# Altium PCB Smart shoe.PcbDoc
Units mm, origin at the board's own origin, x right, y up, seen from the top; angles counter-clockwise.
Board outline 43.2 x 30.56 mm, 2 copper layers (Top Layer, Bottom Layer); 36 components, 26 nets, 138 pads, 221 vias.
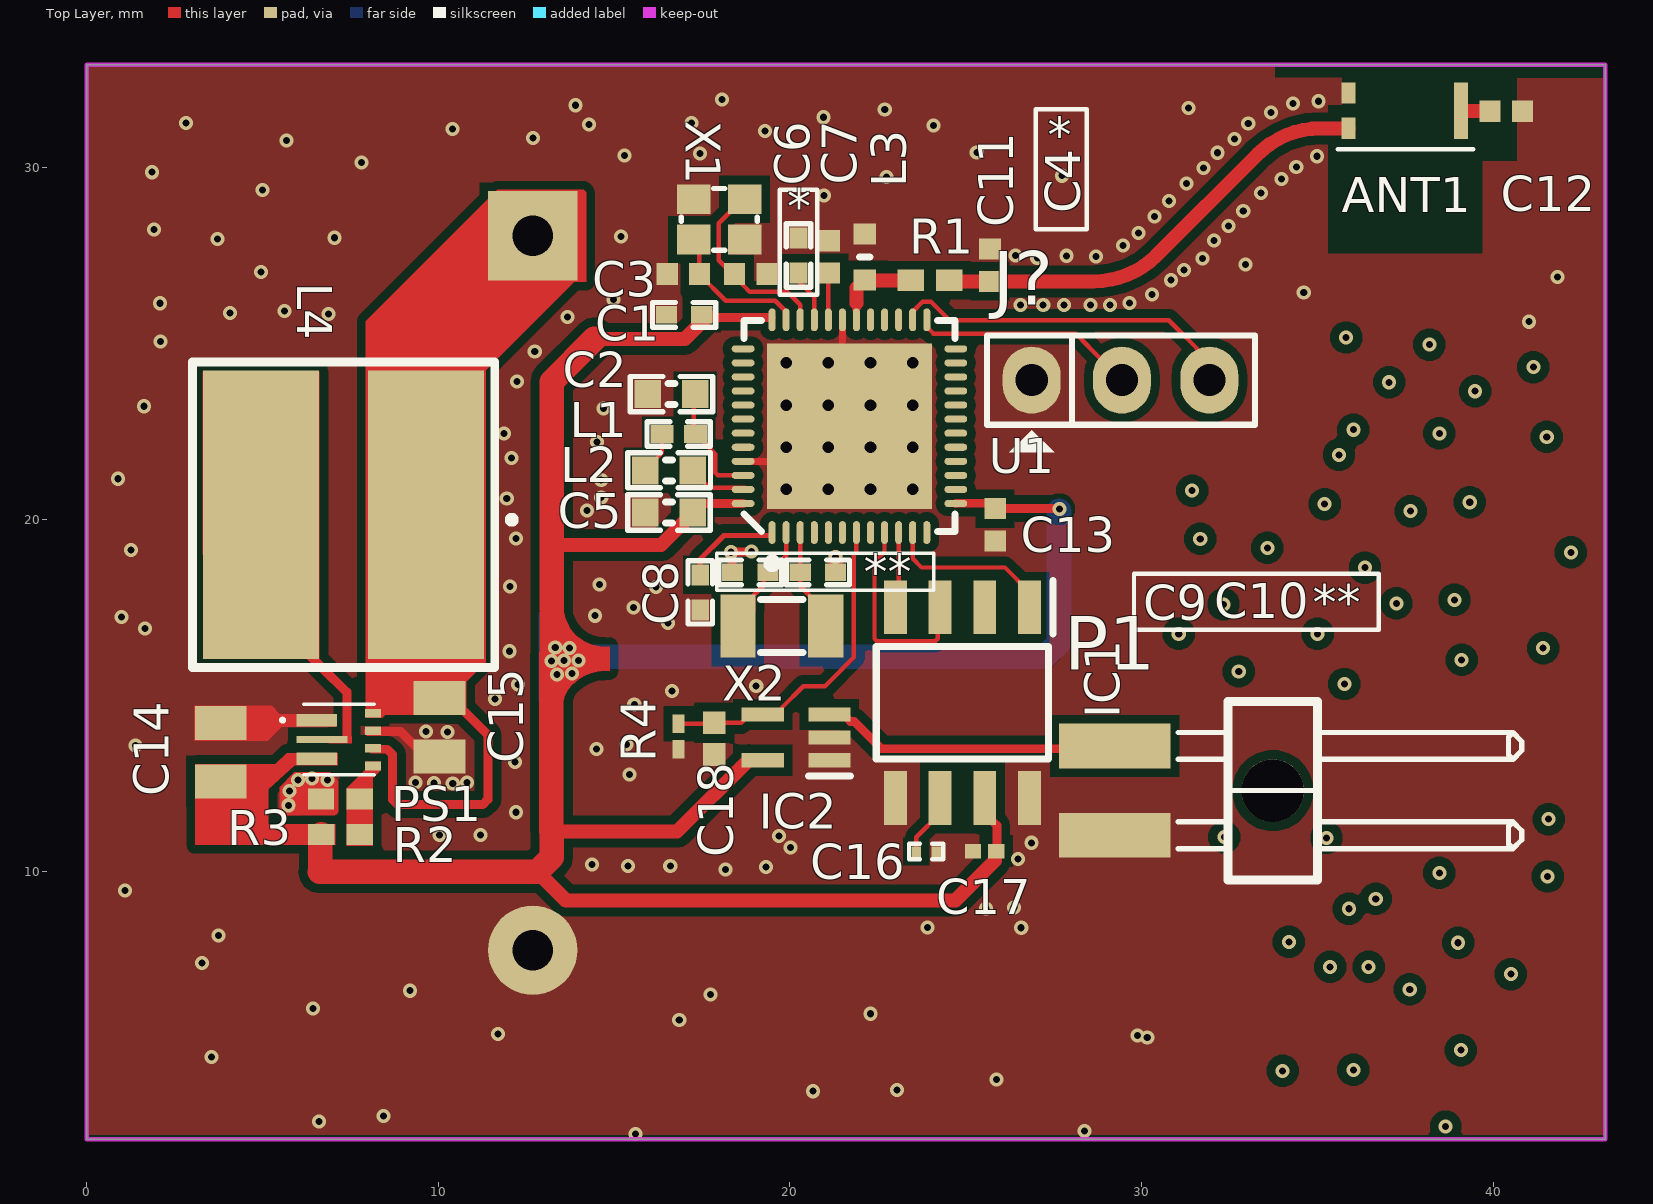
[diagram p0: Top Layer view]
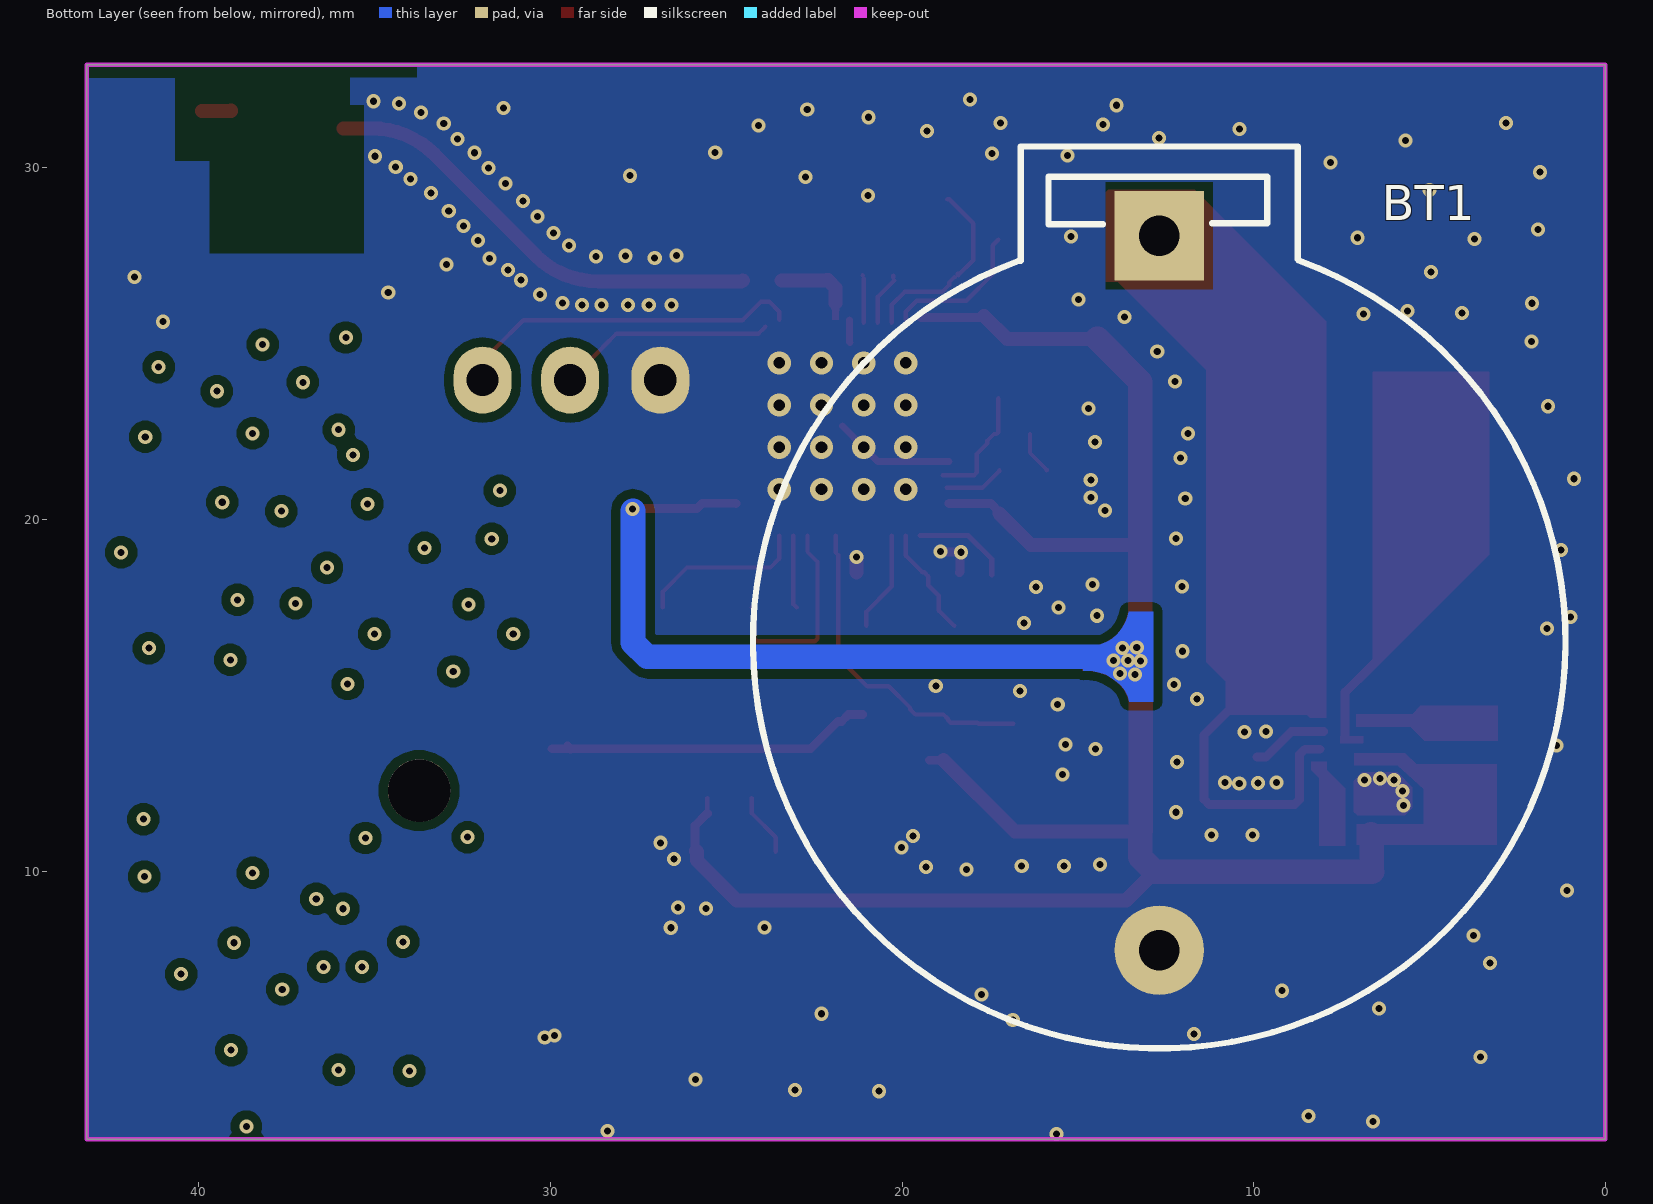
[diagram p1: Bottom Layer view, seen from below]
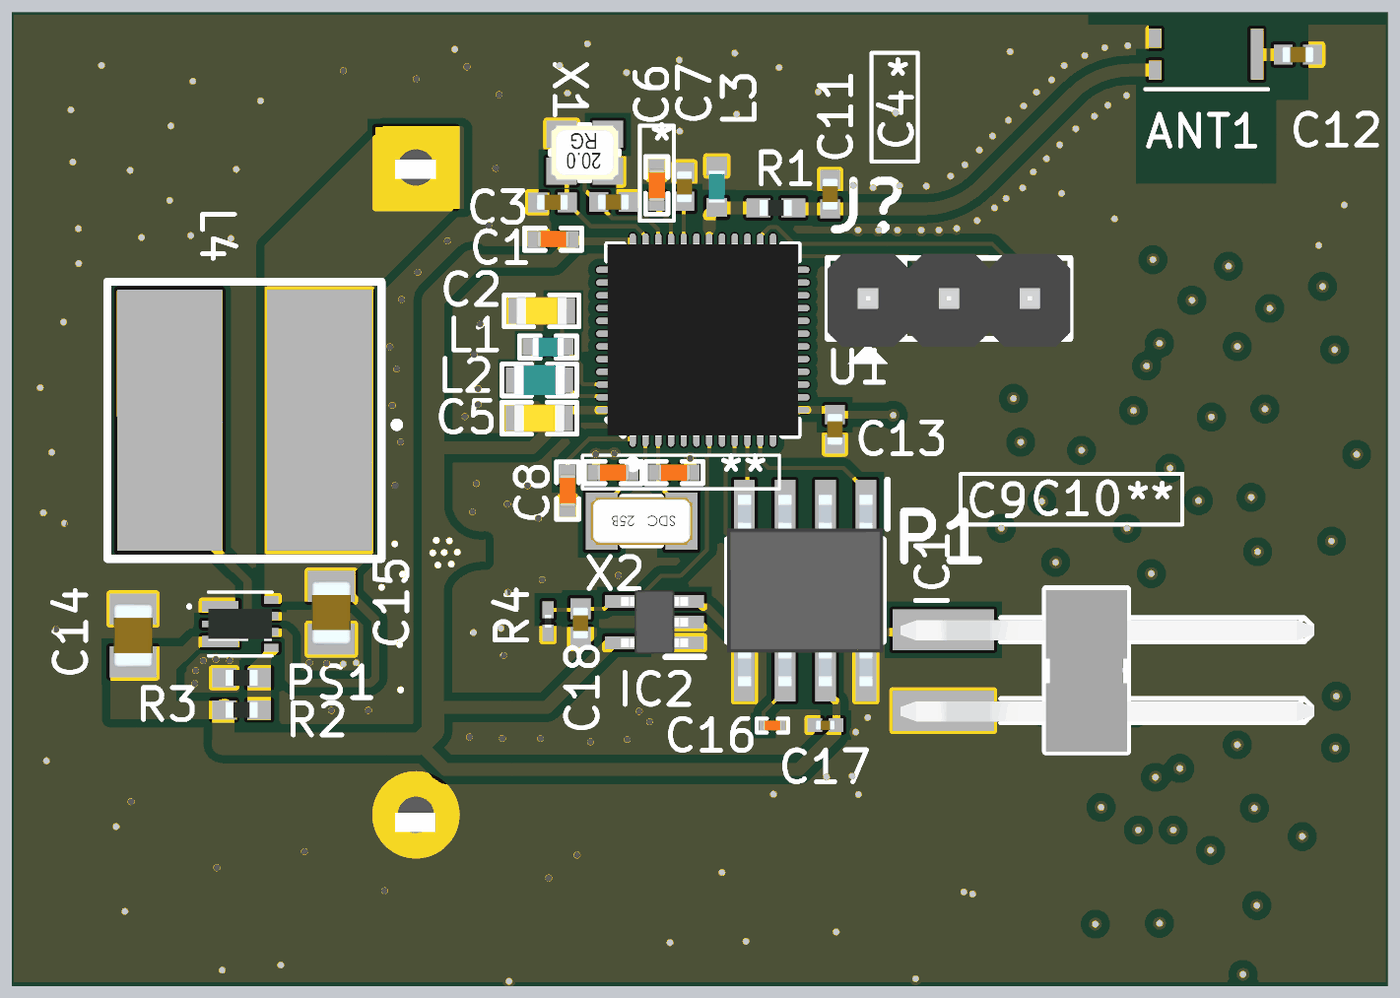
[diagram p2: 3D render of the assembled board from above, using the file's embedded part models]

## Layer stack, top to bottom
Top Solder: solder mask 0.0102, Solder Resist, Dk 3.5
Top Layer: signal copper 0.0356
Dielectric 1: dielectric 0.32, FR-4, Dk 4.8
Bottom Layer: signal copper 0.0356
Bottom Solder: solder mask 0.0102, Solder Resist, Dk 3.5

## Board outline
-0.001,2.374 -0.001,32.935 8.112,32.935 29.709,32.935 43.195,32.935 43.195,2.374

## Design rules (kind name [scope] priority, off if disabled: settings)
Clearance Outline [OnLayer('Keep-Out Layer')    and IsTrack] p1: gap=0 ignorepadtopadclearanceinfootprint=FALSE
Clearance ANT [InNet('ANT1')] p2: gap=0.254 ignorepadtopadclearanceinfootprint=FALSE
Clearance Polygon [InPolygon] p3: gap=0.254 ignorepadtopadclearanceinfootprint=FALSE
Clearance Keepout [IsKeepOut] p4: gap=0.254 ignorepadtopadclearanceinfootprint=FALSE
Clearance [All] p5: gap=0.125 ignorepadtopadclearanceinfootprint=FALSE
HoleToHoleClearance [All] p1: gap=0 allowstackedmicrovias=TRUE
MinimumSolderMaskSliver [All] p1: minsoldermaskwidth=0
PolygonConnect [All] p1: connectstyle=Direct reliefconductorwidth=0.254 reliefentries=4 polygonreliefangle="90 Angle" airgapwidth=0.254
RoomDefinition "Smart shoe_MCU" [InComponentClass('Smart shoe_MCU')] p1 off: confinementstyle=ConfineIn formatcopy=TRUE lockcomponents=FALSE outline -75.115,-66.395 -24.315,-66.395 -24.315,-40.995 -75.115,-40.995
RoomDefinition "Smart shoe_Sensor" [InComponentClass('Smart shoe_Sensor')] p2 off: confinementstyle=ConfineIn formatcopy=TRUE lockcomponents=FALSE outline 103.828,12.345 149.929,12.345 149.929,32.792 103.828,32.792
RoomDefinition "Smart shoe_Power" [InComponentClass('Smart shoe_Power')] p3 off: confinementstyle=ConfineIn formatcopy=TRUE lockcomponents=FALSE outline 103.828,-20.548 161.232,-20.548 161.232,11.075 103.828,11.075
RoutingVias [All] p1: holewidth=0.2 width=0.4 viastyle="Through Hole" minholewidth=0.2 minwidth=0.4 maxholewidth=0.711 maxwidth=1.27
SilkToSilkClearance [All] p1: silktosilkclearance=0
SilkToSolderMaskClearance [IsPad] p1: minsilkscreentomaskgap=0 clearancetoexposedcopper=TRUE
SolderMaskExpansion [All] p1: expansion=0.102 istentingtop=FALSE
Width [All] p1: maxlimit=2 minlimit=0 preferedwidth=0.254
26 further rules are at their usual default settings.

## Classes and differential pairs
component class "Smart shoe_Sensor": C16 C17 C18 IC1 IC2 P1 R4
component class "Smart shoe_Power": BT1 C14 C15 L4 PS1 R2 R3
component class "Smart shoe_MCU": ANT1 C1 C2 C3 C4 C5 C6 C7 C8 C9 C10 C11 C12 C13 J? L1 L2 L3 R1 U1 X1 X2

## Components (designator, comment, footprint, x,y, rotation, side; value= is the part's Value field where it differs from the comment)
ANT1 "WLA.01" TAOGLAS_WLA.01 37.486,31.625 r0 top
BT1 "PIN 3V" PIN3V 12.688,28.068 r270 bottom locked
C1 "100nF" CAPC1005X04L 16.994,25.82 r0 top value=1.2pF
C2 "1uF" CAPC1608X06L 16.635,23.566 r0 top value=4.7µF
C3 "1.2pF" CAPC1005X55N 16.973,26.978 r0 top
C4 "1.2pF" CAPC1005X55N 18.887,26.984 r180 top
C5 "4.7µF" CAPC1608X06L 16.562,20.197 r180 top
C6 "100nF" CAPC1005X04L 20.245,27.509 r270 top value=1.2pF
C7 "NC" CAPC1005X55N 21.116,27.466 r270 top value=1.2pF
C8 "100nF" CAPC1005X04L 17.451,17.925 r270 top value=1.2pF
C9 "1.2pF" CAPC1005X04L 18.873,18.495 r0 top
C10 "1.2pF" CAPC1005X04L 20.794,18.495 r180 top
C11 "1.5pF" CAPC1005X55N 25.691,27.23 r270 top
C12 "3.9pF" CAPC1005X55N 40.373,31.611 r180 top
C13 "100nF" CAPC1005X55N 25.839,19.849 r90 top value=1.2pF
C14 "15uF" CAPC2012X145N 3.812,13.379 r270 top
C15 "10uF" CAPC2012X145N 10.033,14.093 r90 top
C16 "0.1uF" CAPC0603X03L_C 23.878,10.553 r180 top
C17 "1uF" CAPC0603X33N 25.538,10.565 r0 top
C18 "47pF" CAPC1005X56N 17.854,13.768 r90 top
IC1 "AIS1120SXTR" SOIC127P600X175-8N 24.907,14.788 r270 top
IC2 "OPA991TIDCKR" SOT65P210X110-5N 20.177,13.801 r180 top
J? "Jumper 3" JP3 29.419,23.961 r0 top value=J3
L1 "15nH" INDC1005X04L 16.838,22.431 r0 top
L2 "10µH" INDC1608X06L 16.567,21.397 r180 top
L3 "2.2nH" INDC1005X60N 22.132,27.466 r270 top
L4 "VLP8040T-1R0N" VLP8040T_1 7.307,20.133 r180 top
P1 "Pin List 1x2, Angled" LIST_ANG_1x2-SMD-2.54MM 29.24,12.288 r90 top
PS1 "TPS61022RWUR" TPS61022RWUR 7.173,13.74 r0 top
R1 "0R" RESC1005X40N 23.983,26.802 r0 top
R2 "453K" RESC1005X40N 7.217,11.041 r180 top
R3 "100K" RESC1005X40N 7.216,12.054 r0 top
R4 "100k" RESC0402X15N 16.835,13.826 r90 top
U1 "nRF52832-QFAAE0" QFN40P600X600X90-48N 21.695,22.653 r90 top
X1 "32MHz" BT-XTAL_2016 17.988,28.532 r180 top
X2 "32.768kHz" XTAL_3215 19.77,16.971 r180 top

## Footprints (in the part's own frame and the unit in brackets; to place one, negate y for a bottom-side part, rotate by r counter-clockwise, add the part's x,y. Pads: shape width x height; smd on the part's side, far side on the other; paste and mask are expansions set on the pad)
BT-XTAL_2016 [mm]
  rect 0.95x0.85 smd: 1(-0.725,-0.575) 2(0.725,-0.575) 3(0.725,0.575) 4(-0.725,0.575)
  silkscreen extent -1.08,-0.88 1.08,0.88, body extent -1.05,-0.85 1.05,0.85, height 0.56
CAPC0603X03L_C [mm]
  rect 0.27x0.3 smd: 1(-0.285,0) 2(0.285,0)
  silkscreen extent -0.49,-0.22 0.49,0.22, body extent -0.3,-0.15 0.31,0.15, height 0.3
CAPC0603X33N [mm]
  rect 0.46x0.42 smd: 1(-0.33,0) 2(0.33,0)
  body extent -0.3,-0.15 0.3,0.15, height 0.33
CAPC1005X04L [mm]
  rect 0.6x0.5 smd: 1(-0.5,0) 2(0.5,0)
  silkscreen extent -0.9,-0.35 0.9,0.35, body extent -0.51,-0.25 0.51,0.25, height 0.5
CAPC1005X55N [mm]
  rect 0.6x0.62 smd: 1(-0.46,0) 2(0.46,0)
  body extent -0.5,-0.25 0.5,0.25, height 0.55
CAPC1005X56N [mm]
  rect 0.65x0.64 smd: 1(-0.45,0) 2(0.45,0)
  body extent -0.5,-0.25 0.5,0.25, height 0.56
CAPC1608X06L [mm]
  rect 0.75x0.8 smd: 1(-0.675,0) 2(0.675,0)
  silkscreen extent -1.17,-0.5 1.17,0.5, body extent -0.8,-0.43 0.8,0.43, height 0.8
CAPC2012X145N [mm]
  rect 0.97x1.47 smd: 1(-0.83,0) 2(0.83,0)
  body extent -1,-0.63 1,0.63, height 1.45
INDC1005X04L [mm]
  rect 0.65x0.5 smd: 1(-0.475,0) 2(0.475,0)
  silkscreen extent -0.9,-0.35 0.9,0.35, body extent -0.5,-0.3 0.5,0.3, height 0.5
INDC1005X60N [mm]
  rect 0.6x0.65 smd: 1(-0.65,0) 2(0.65,0)
  silkscreen extent 0,-0.15 0,0.15, body extent -0.5,-0.25 0.5,0.25, height 0.6
INDC1608X06L [mm]
  rect 0.75x0.8 smd: 1(-0.675,0) 2(0.675,0)
  silkscreen extent -1.17,-0.5 1.17,0.5, body extent -0.8,-0.48 0.8,0.48, height 0.8
JP3 [mil] "Jumper 3"
  oval 65x75 hole 36: 1(-100,0) 2(1,0) 3(99,0)
  silkscreen extent -150,-81 150,50, body extent -150,-60 150,55, height 355
LIST_ANG_1x2-SMD-2.54MM [mm]
  round 1.78 hole 1.78 unplated: 0(0,-4.496)
  rect 1.27x3.18 smd: 1(-1.27,0) 2(1.27,0)
  silkscreen extent -2.54,-11.58 2.54,-1.8, body extent -2.56,-11.61 2.52,1.35, height 3.03
PIN3V [mil]
  rect 100x100 hole 45: 1(0,0)
  round 100 hole 45: 2(800,0)
  silkscreen extent -100,-455 910,455, body extent -128,-447 1002,449, height 278
QFN40P600X600X90-48N [mm]
  oval 0.65x0.2 smd mask+0.05: 1(-3.025,2.2) 2(-3.025,1.8) 3(-3.025,1.4) 4(-3.025,1) 5(-3.025,0.6) 6(-3.025,0.2) 7(-3.025,-0.2) 8(-3.025,-0.6) 9(-3.025,-1) 10(-3.025,-1.4) 11(-3.025,-1.8) 12(-3.025,-2.2) 25(3.025,-2.2) 26(3.025,-1.8) 27(3.025,-1.4) 28(3.025,-1) 29(3.025,-0.6) 30(3.025,-0.2) 31(3.025,0.2) 32(3.025,0.6) 33(3.025,1) 34(3.025,1.4) 35(3.025,1.8) 36(3.025,2.2)
  oval 0.2x0.65 smd mask+0.05: 13(-2.2,-3.025) 14(-1.8,-3.025) 15(-1.4,-3.025) 16(-1,-3.025) 17(-0.6,-3.025) 18(-0.2,-3.025) 19(0.2,-3.025) 20(0.6,-3.025) 21(1,-3.025) 22(1.4,-3.025) 23(1.8,-3.025) 24(2.2,-3.025) 37(2.2,3.025) 38(1.8,3.025) 39(1.4,3.025) 40(1,3.025) 41(0.6,3.025) 42(0.2,3.025) 43(-0.2,3.025) 44(-0.6,3.025) 45(-1,3.025) 46(-1.4,3.025) 47(-1.8,3.025) 48(-2.2,3.025)
  rect 4.7x4.7 smd: 49(0,0)
  silkscreen extent -4.02,-3 3,3, body extent -3.02,-3.02 3.02,3.02, height 0.86
RESC0402X15N [mm]
  rect 0.525x0.35 smd: 1(-0.362,0) 2(0.362,0)
  body extent -0.2,-0.1 0.2,0.1, height 0.15
RESC1005X40N [mm]
  rect 0.75x0.6 smd: 1(-0.55,0) 2(0.55,0)
  body extent -0.5,-0.25 0.5,0.25, height 0.4
SOIC127P600X175-8N [mm]
  rect 1.525x0.65 smd: 1(-2.712,1.905) 2(-2.712,0.635) 3(-2.712,-0.635) 4(-2.712,-1.905) 5(2.712,-1.905) 6(2.712,-0.635) 7(2.712,0.635) 8(2.712,1.905)
  silkscreen extent -3.47,-2.45 1.6,2.58, body extent -3,-2.45 3,2.45, height 1.75
SOT65P210X110-5N [mm]
  rect 1.2x0.4 smd: 1(-0.95,0.65) 2(-0.95,0) 3(-0.95,-0.65) 4(0.95,-0.65) 5(0.95,0.65)
  silkscreen extent -1.55,1.1 -0.35,1.1, body extent -1.05,-1 1.05,1, height 1
TAOGLAS_WLA.01 [mm] "ANT HIGH EFFICIENCY LOOP SMT"
  rect 0.4x0.6 smd paste-0.01 mask+0.1: 1(-1.6,-0.5) 2(-1.6,0.5)
  rect 0.4x1.6 smd paste-0.01 mask+0.1: 3(1.6,0)
  silkscreen extent -1.9,-1.1 1.95,-1.1, body extent -1.75,-0.95 1.75,0.95, height 0.8
TPS61022RWUR [mm]
  rect 1.15x0.35 smd: 1(-0.625,0.55) 3(-0.625,-0.55)
  rect 1.45x0.2 smd: 2(-0.475,0)
  rect 0.45x0.25 smd: 4(0.975,-0.75) 5(0.975,-0.25) 6(0.975,0.25) 7(0.975,0.75)
  silkscreen extent -1.65,-1 1,1, body extent -1,-0.53 1,0.48, height 1
VLP8040T_1 [mm]
  rect 3.3x8.2 smd: 1(-2.35,0) 2(2.35,0)
  silkscreen extent -4.85,-4.35 4.3,4.35
XTAL_3215 [mm]
  rect 1x1.8 smd: 1(-1.25,0) 2(1.25,0)
  silkscreen extent -0.6,-0.75 0.6,0.75, body extent -1.6,-0.75 1.6,0.75, height 0.81

## Part data
ANT1: library part TAOGLAS_WLA.01, "2.5dBi 240 0MHz to 250MHz WLAN/WIFI/Bluetooth/Zigbee", Temp_High=+85C, Temp_Low=-40C, ComponentLibStatus=Created, Datasheet=http://cdn.taoglas.com/datasheets/WLA.01.pdf, FootprintLibStatus=Created, MFG=Taoglas, MFGPN=WLA.01, RoHS="RoHS Compliant", Version=1.0
BT1: "Battery 3VDC"
C1 C3 C4 C6 C7 C8 C9 C10 C13: "Capacitor, NP0, ±0.1pF", Part Number=C0402-1.2p, Part number IPS=00000005410, Artikkelnr Noca=20029157, Artikkelnr Simpro=N.A., Footprint Doc=0402, LatestRevisionDate=2011-05-11, Note=50V, Pin Count=2, Published=2009-05-08, Publisher="Nordic Semiconductor"
C2 C5: "Capacitor, X5R, ±10%", Part Number=C0603-4µ7, Part number IPS=00000007783, Artikkelnr Noca=20069060, Artikkelnr Simpro=N.A., Footprint Doc=0603, LatestRevisionDate=2009-11-23, Note=6.3V, Pin Count=2, Published=2009-05-08, Publisher="Nordic Semiconductor"
C11: library part GRM1555C1H3R9CA01D, "Capacitor", Manufacturer_Name="Murata Electronics", Mouser Part Number=81-GRM1555C1H3R9CA1D, Arrow Part Number=GRM1555C1H3R9CA01D, Arrow Price/Stock=https://www.arrow.com/en/products/grm1555c1h3r9ca01d/murata-manufacturing, Datasheet Link=https://datasheet.datasheetarchive.com/originals/distributors/Datasheets_SAMA/ec4f1577dddcc7a13ddad897a28002d3.pdf, Height=0.55mm, Manufacturer_Part_Number=GRM1555C1H3R9CA01D, Mouser Price/Stock=https://www.mouser.co.uk/ProductDetail/Murata-Electronics/GRM1555C1H3R9CA01D?qs=4k9rjS6ZRl60G7lbEFmGRg%3D%3D
C12: library part GRM1555C1H1R5CA01D, "Capacitor", Manufacturer_Name="Murata Electronics", Mouser Part Number=81-GRM1555C1H1R5CA1D, Arrow Part Number=GRM1555C1H1R5CA01D, Arrow Price/Stock=https://www.arrow.com/en/products/grm1555c1h1r5ca01d/murata-manufacturing, Datasheet Link=https://datasheet.datasheetarchive.com/originals/distributors/Datasheets_SAMA/ec4f1577dddcc7a13ddad897a28002d3.pdf, Height=0.55mm, Manufacturer_Part_Number=GRM1555C1H1R5CA01D, Mouser Price/Stock=https://www.mouser.co.uk/ProductDetail/Murata-Electronics/GRM1555C1H1R5CA01D?qs=to8XolpOzrMkK3a3HyCgMg%3D%3D
C14: library part C2012X5R1V156M125AC, "Capacitor", Manufacturer_Name=TDK, Mouser Part Number=810-C2012X5R1V156M1C, Arrow Part Number=C2012X5R1V156M125AC, Arrow Price/Stock=https://www.arrow.com/en/products/c2012x5r1v156m125ac/tdk?region=nac, Datasheet Link=https://product.tdk.com/en/search/list#pn=C1608C0G1E103J080AA&site=FBNXDO0R&charset=UTF-8&group=tdk_pdc_en&design=producttdkcom-en&fromsyncsearch=1&_l=20&_p=1&_c=part_no-part_no&_d=667, Height=0.75mm, Manufacturer_Part_Number=C2012X5R1V156M125AC, Mouser Price/Stock=https://www.mouser.co.uk/ProductDetail/TDK/C2012X5R1V156M125AC?qs=xLDY6iXSiQZGpZ5eDP6b8w%3D%3D
C15: library part C0805C106K8PACTU, "Capacitor", Manufacturer_Name=Kemet, Mouser Part Number=80-C0805C106K8P, Arrow Part Number=C0805C106K8PACTU, Arrow Price/Stock=https://www.arrow.com/en/products/c0805c106k8pactu/kemet-corporation, Datasheet Link=https://www.arrow.com/en/products/c0805c106k8pactu/kemet-corporation, Height=1.4mm, Manufacturer_Part_Number=C0805C106K8PACTU, Mouser Price/Stock=https://www.mouser.co.uk/ProductDetail/KEMET/C0805C106K8PACTU?qs=Zpyg6gQUYs39C21BeavaKA%3D%3D
C16: library part C0603X7S1A104K030BC, "Capacitor", Manufacturer_Name=TDK, Mouser Part Number=810-C0603X7S1A104K, Datasheet Link=https://product.tdk.com/system/files/dam/doc/product/capacitor/ceramic/mlcc/catalog/mlcc_commercial_general_en.pdf, Height=0.33mm, Manufacturer_Part_Number=C0603X7S1A104K030BC, Mouser Price/Stock=https://www.mouser.com/Search/Refine.aspx?Keyword=810-C0603X7S1A104K
C17: library part GRM033R61A105ME15E, "Capacitor", Manufacturer_Name="Murata Electronics", Mouser Part Number=81-GRM033R61A105ME5E, Datasheet Link=https://datasheet.datasheetarchive.com/originals/distributors/DKDS-10/190794.pdf, Height=0.33mm, Manufacturer_Part_Number=GRM033R61A105ME15E, Mouser Price/Stock=https://www.mouser.co.uk/ProductDetail/Murata-Electronics/GRM033R61A105ME15E?qs=BZBei1rCqCCF%2FCkYfqSFSg%3D%3D
C18: library part 0402ZA470JAT2A, "Capacitor", Manufacturer_Name=AVX, Height=0.56mm, Manufacturer_Part_Number=0402ZA470JAT2A
IC1: "Integrated Circuit", Manufacturer_Name=STMicroelectronics, Mouser Part Number=511-AIS1120SXTR, Arrow Part Number=AIS1120SXTR, Arrow Price/Stock=https://www.arrow.com/en/products/ais1120sxtr/stmicroelectronics?region=nac, Datasheet Link=https://www.st.com/resource/en/datasheet/ais1120sx.pdf, Height=1.75mm, Manufacturer_Part_Number=AIS1120SXTR, Mouser Price/Stock=https://www.mouser.co.uk/ProductDetail/STMicroelectronics/AIS1120SXTR?qs=BA62vJVifGoAj%2Fv2Aa%252BKHA%3D%3D
IC2: "Integrated Circuit", Manufacturer_Name="Texas Instruments", Mouser Part Number=595-OPA991TIDCKR, Datasheet Link=https://www.ti.com/lit/ds/symlink/opa991.pdf?ts=1634650356786&ref_url=https%253A%252F%252Feu.mouser.com%252F, Height=1.1mm, Manufacturer_Part_Number=OPA991TIDCKR, Mouser Price/Stock=https://www.mouser.co.uk/ProductDetail/Texas-Instruments/OPA991TIDCKR?qs=Wj%2FVkw3K%252BMD%2FIzu2Yv2xzw%3D%3D
J?: library part JP3
L1: "Inductor, 320mA, ±5%", 2nd source part number=658-1328, Manufacturer="Taiyo Yuden", Manufacturer Part Number=HK100515NJ-T, Part Number=L0402-15n, Part number IPS=00000003215, Supplier part number=587-1521-1-ND, 2nd source Supplier=Farnell, Artikkelnr Noca=33029323, Artikkelnr Simpro=N.A., ComponentLink1Description=Datasheet, ComponentLink2Description="Supplier link", Datasheet=http://www.yuden.co.jp/productdata/catalog/en/mlci04_e.pdf, Footprint Doc=0402, LatestRevisionDate=2012-09-19, Note="High frequency chip inductor ±10%", Pin Count=2, Published=2010-07-12, Publisher="Nordic Semiconductor", Supplier=Digi-Key
L2: "Inductor, 80mA, ±10%", 2nd source part number=178-6105, Manufacturer="Taiyo Yuden", Manufacturer Part Number=LBMF1608T100K, Part Number=L0603-10µ, Part number IPS=00000007794, Supplier part number=587-1714-1-ND, 2nd source Supplier=Farnell, Artikkelnr Noca=33029314, Artikkelnr Simpro=N.A., ComponentLink1Description=Datasheet, ComponentLink2Description="Supplier link", Datasheet=http://www.yuden.co.jp/ut/product/pdf/elb2_e.pdf, Footprint Doc=0603, LatestRevisionDate=2012-09-19, Note="LBMF1608T100K 10µH 80mA 0603", Pin Count=2, Published=2010-02-24, Publisher="Nordic Semiconductor", Supplier=Digi-Key
L3: library part MLK1005S2N2ST000, "Inductor", Manufacturer_Name=TDK, Mouser Part Number=810-MLK1005S2N2ST000, Arrow Part Number=MLK1005S2N2ST000, Arrow Price/Stock=https://www.arrow.com/en/products/mlk1005s2n2st000/tdk, Datasheet Link=https://product.tdk.com/system/files/dam/doc/product/inductor/inductor/smd/catalog/inductor_commercial_high-frequency_mlk1005_en.pdf, Height=0.6mm, Manufacturer_Part_Number=MLK1005S2N2ST000, Mouser Price/Stock=https://www.mouser.com/Search/Refine.aspx?Keyword=810-MLK1005S2N2ST000
L4: "Inductor", Manufacturer_Name=TDK, Mouser Part Number=810-VLP8040T-1R0N, Arrow Part Number=VLP8040T-1R0N, Arrow Price/Stock=https://www.arrow.com/en/products/vlp8040t-1r0n/tdk, Datasheet Link=http://www.mouser.com/ds/2/400/nductor_commercial_power_vlp8040_en-952627.pdf, Manufacturer_Part_Number=VLP8040T-1R0N, Mouser Price/Stock=https://www.mouser.co.uk/ProductDetail/TDK/VLP8040T-1R0N?qs=uxmvvYJjMIuWRhSk5I768Q%3D%3D
P1: "Pin List 1x2, 2.54mm (100mil), Right Angled, SMD", 2nd source part number=TSM-102-01-L-SH-A, Manufacturer=W-CON, Manufacturer Part Number=1125B-1102S0Z135R2, Part Number="Pin List Ang 1x2 SMD, 2.54mm", 2nd source Supplier=Samtec, Artikkelnr Noca=55010023, Artikkelnr Simpro=N.A., Datasheet=\\hizz\pro\app9717\Datasheet\connectores\W-CON\1125B-11XXXXZXXXXX.pdf, Footprint Doc=LIST_ANG_1x2-SMD-2.54MM, LatestRevisionDate=2016-05-26, Pin Count=2, Published=2016-01-22, Publisher="Nordic Semiconductor", Supplier=Cabcon, Supplier part number=1125B-1102S0Z135R2
PS1: "Power Supply", Manufacturer_Name="Texas Instruments", Mouser Part Number=595-TPS61022RWUR, Arrow Part Number=TPS61022RWUR, Arrow Price/Stock=https://www.arrow.com/en/products/tps61022rwur/texas-instruments?region=nac, Datasheet Link=http://www.ti.com/lit/gpn/TPS61022, Height=1mm, Manufacturer_Part_Number=TPS61022RWUR, Mouser Price/Stock=https://www.mouser.co.uk/ProductDetail/Texas-Instruments/TPS61022RWUR?qs=vLWxofP3U2zlxrk4cD0iFA%3D%3D
R1: library part RC0402FR070RL, "Resistor", Manufacturer_Name="YAGEO (PHYCOMP)", Height=0.4mm, Manufacturer_Part_Number=RC0402FR070RL
R2: library part CRCW0402453KFKED, "Resistor", Manufacturer_Name=Vishay, Mouser Part Number=71-CRCW0402-453K-E3, Arrow Part Number=CRCW0402453KFKED, Arrow Price/Stock=https://www.arrow.com/en/products/crcw0402453kfked/vishay, Datasheet Link=http://www.vishay.com/docs/20035/dcrcwe3.pdf, Height=0.4mm, Manufacturer_Part_Number=CRCW0402453KFKED, Mouser Price/Stock=https://www.mouser.co.uk/ProductDetail/Vishay-Dale/CRCW0402453KFKED?qs=rzhQWu8UUS1a9YBNTq1G%2FA%3D%3D
R3: library part CRCW0402100KFKEDHP, "Resistor", Manufacturer_Name=Vishay, Mouser Part Number=71-CRCW0402100KFKEDH, Arrow Part Number=CRCW0402100KFKEDHP, Arrow Price/Stock=https://www.arrow.com/en/products/crcw0402100kfkedhp/vishay?region=nac, Datasheet Link=http://www.vishay.com/docs/20035/dcrcwe3.pdf, Height=0.4mm, Manufacturer_Part_Number=CRCW0402100KFKEDHP, Mouser Price/Stock=https://www.mouser.co.uk/ProductDetail/Vishay-Dale/CRCW0402100KFKEDHP?qs=k2%2FDWSARqgGFakjlJe4Ejw%3D%3D
R4: library part CRCW0100100KFREL, "Resistor", Manufacturer_Name=Vishay, Mouser Part Number=71-CRCW0100100KFREL, Arrow Part Number=CRCW0100100KFREL, Arrow Price/Stock=https://www.arrow.com/en/products/crcw0100100kfrel/vishay?region=nac, Datasheet Link=https://www.mouser.com/datasheet/2/427/crcw01005e3-1149660.pdf, Height=0.15mm, Manufacturer_Part_Number=CRCW0100100KFREL, Mouser Price/Stock=https://www.mouser.co.uk/ProductDetail/Vishay-Dale/CRCW0100100KFREL?qs=3CaSHoNeR5u3JhUOs4PYBg%3D%3D
U1: "Multi-protocol Bluetooth Low Energy, ANT and 2.4GHz proprietary system-on-chip", Manufacturer="Nordic Semiconductor", Part number IPS=N.A., Artikkelnr Noca=N.A., ComponentLink1Description=Datasheet, ComponentLink2Description="Supplier link", Footprint Doc=QFN-48, LatestRevisionDate=2017-10-18, Manufacturer Part Number=nRF52832-QFAAE0, Part Number=nRF52832-QFAAE0, Pin Count=48, Published=2017-10-18, Publisher="Nordic Semiconductor", Supplier 1="Nordic Semiconductor", Supplier Part Number 1=nRF52832-QFAAE0
X1: "XTAL SMD 2016, 32MHz, Cl=8pF, Tol: ±10ppm, Stab: ±10ppm", Manufacturer="Epson Toyocom", Manufacturer Part Number=Q22FA12800025, Part Number=XTAL_SMD2016_32MHz_8pF_Epson, Supplier part number=171-2806, Artikkelnr Noca=22019238, Artikkelnr Simpro=N.A., Datasheet=http://www.epsondevice.com/docs/qd/en/DownloadServlet?id=ID000449, Footprint Doc=XTAL_2016, LatestRevisionDate=2014-11-27, Note="XTAL SMD 32.000MHz", Pin Count=4, Published=2012-03-09, Publisher="Nordic Semiconductor", Supplier=Farnell
X2: "XTAL SMD 3215, 32.768kHz, 9pF, ±20ppm", 2nd source part number=127-8037, Manufacturer="Epson Toyocom", Manufacturer Part Number="FC-135 32.768KHZ ±20PPM,9.0PF", Part Number="XTAL_FC-135 32.768k", Supplier part number="FC-135 32.7680KA-AC-ND", 2nd source Supplier=Farnell, Artikkelnr Noca=22019091, Artikkelnr Simpro=N.A., Datasheet=http://www.farnell.com/datasheets/57480.pdf, Footprint Doc=XTAL_3215, LatestRevisionDate=2014-03-27, Note="XTAL SMD 32.768kHz, 3215", Pin Count=2, Published=2010-10-18, Publisher="Nordic Semiconductor", Supplier=Digi-Key

## Via types
v1: diameter 0.4, hole 0.2, Top Layer to Bottom Layer, tented both sides, 205 vias
v2: diameter 0.66, hole 0.33, Top Layer to Bottom Layer, tented both sides, 16 vias

## Nets (pads, with @x,y where several pads share a name; then routed paths per layer and width w, separated by ;. In a path a pad name is that pad's centre, name@x,y a point inside that pad or via, vN(x,y) a via of type N, cw(c..) or ccw(c..) an arc to the next point about the centre after c; other vN are vias at no path point)
ADC: C18.2 IC2.4 R4.2 U1.7 | length 9.3
  Top Layer w0.125: R4.2 17.823,14.188 C18.2 18.616,14.218 18.689,14.292 18.689,14.314 18.827,14.451 19.627,14.451 19.764,14.589 19.764,14.635 20.383,15.254 20.997,15.254 21.823,16.08 21.823,18.99 21.893,19.06 U1.7@21.893,19.544
ANT: L3.2 R1.1 U1.30 | length 2.1
  Top Layer w0.4: 21.897,26.152 21.897,26.581 22.007,26.691 22.007,26.716 22.107,26.816 L3.2 ccw(c22.165,26.849) 22.165,26.802 R1.1
ANT1: ANT1.1 C11.2 R1.2 | length 12.9
  Top Layer w0.4: R1.2 ccw(c24.611,26.879) 24.611,26.77 C11.2 28.636,26.77 ccw(c28.636,29.31) 30.432,27.514 33.3,30.381 cw(c35.096,28.585) 35.096,31.125 ANT1.1
CLK: IC1.1 U1.11 | length 4.8
  Top Layer w0.125: U1.11@23.493,19.544 23.493,18.887 23.748,18.632 26.118,18.632 26.812,17.938 IC1.1
CS: IC1.4 U1.10 | length 2.1
  Top Layer w0.125: IC1.4 23.093,17.591 U1.10@23.093,19.544
GND: ANT1.2 BT1.2 C1.1 C2.1 C3.1 C4.1 C5.2 C6.1 C7.1 C8.2 C9.1 C10.1 C11.1 C12.1 C13.1 C14.1 C15.1 C16.1 C17.1 C18.1 IC1.5 IC1.8 IC2.1 IC2.2 J?.1 L3.1 P1.1 PS1.1 PS1.6 R3.1 R4.1 U1.31 U1.45 U1.49 X1.2 X1.4 | length 7.9
  Top Layer w0.2: U1.45 19.308,21.653 19.32,21.642 20.683,21.642 v2(21.095,22.053) U1.49 ; 21.485,25.037 21.495,25.047 U1.31
  Top Layer w0.254: PS1.6@8.02,13.966 8.928,13.966 9.655,13.239 C15.1@9.905,13.239 ; C9.1 18.353,18.515 18.353,19.046 v1(18.332,19.067) 18.342,19.077 18.905,19.077 v1(18.915,19.088)
  Top Layer w0.4: C10.1 21.295,18.496 v1(21.295,18.933)
  other v1: 15.612,2.524 28.376,2.602 6.607,2.876 8.447,3.033 20.663,3.737 23.051,3.777 25.879,4.074 3.553,4.716 30.165,5.263 29.888,5.325 11.704,5.365 16.854,5.768 22.293,5.941 6.438,6.085 17.747,6.487 9.191,6.596 3.279,7.379 3.749,8.162 26.581,8.387 23.912,8.397 25.574,8.933 26.379,8.962 1.092,9.445 18.169,10.042 19.321,10.117 15.402,10.147 16.599,10.147 14.37,10.191 26.494,10.343 20.024,10.67 26.868,10.804 19.695,10.999 10.033,11.029 11.197,11.029 12.208,11.672 5.746,11.87 5.774,12.279 10.412,12.484 9.883,12.5 9.347,12.524 10.812,12.524 6.013,12.586 6.844,12.593 6.41,12.631 15.438,12.75 12.177,13.096 14.498,13.468 1.391,13.571 15.353,13.605 10.26,13.958 9.651,13.966 15.575,14.733 11.611,14.888 16.651,15.126 19.044,15.262 12.269,15.302 12.024,16.251 1.658,16.898 16.532,17.057 0.992,17.231 14.464,17.262 15.558,17.501 12.039,18.089 16.19,18.082 14.584,18.15 1.258,19.128 12.208,19.452 14.225,20.252 11.948,20.601 14.635,20.628 14.635,21.123 0.892,21.157 12.086,21.749 14.515,22.2 11.871,22.438 14.703,23.157 1.626,23.219 12.239,23.924 12.744,24.782 2.1,25.057 41.026,25.623 41.026,25.623 13.678,25.762 6.879,25.838 4.076,25.869 5.623,25.93 26.565,26.105 27.206,26.105 27.803,26.105 28.55,26.105 29.102,26.105 2.09,26.149 29.663,26.154 14.98,26.252 30.304,26.403 34.616,26.455 30.847,26.804 41.832,26.89 4.964,27.033 31.216,27.098 32.959,27.257 27.037,27.433 31.735,27.427 28.709,27.483 26.416,27.508 27.873,27.499 29.471,27.797 32.064,27.929 3.721,27.979 7.048,28.012 15.194,28.044 29.918,28.153 1.917,28.243 32.48,28.345 30.373,28.617 32.896,28.778 30.787,29.055 20.968,29.208 33.398,29.281 4.995,29.376 31.283,29.552 33.987,29.679 22.754,29.743 27.746,29.776 1.857,29.876 31.763,29.999 34.404,30.024 7.813,30.157 34.992,30.33 15.302,30.356 17.446,30.402 25.316,30.441 32.169,30.429 5.684,30.774 32.641,30.818 12.698,30.846 19.299,31.045 10.409,31.107 14.291,31.229 24.085,31.207 2.82,31.275 17.197,31.273 33.038,31.265 20.957,31.44 33.684,31.58 22.699,31.658 31.339,31.706 13.908,31.78 34.313,31.828 35.033,31.894 18.074,31.949
  other v2: 19.895,20.853 21.095,20.853 22.295,20.853 23.495,20.853 19.895,22.053 22.295,22.053 23.495,22.053 19.895,23.253 21.095,23.253 22.295,23.253 23.495,23.253 19.895,24.453 21.095,24.453 22.295,24.453 23.495,24.453
NetANT1_3: ANT1.3 C12.2 | length 0.8
  Top Layer w0.4: ANT1.3 39.086,31.611 C12.2
NetC2_2: C2.2 L1.2 U1.46 | length 3.4
  Top Layer w0.125: C2.2@17.272,23.443 17.272,22.472 L1.2 17.388,22.431 17.575,22.244 17.575,22.169 17.881,21.862 17.881,21.332 17.955,21.259 U1.46@18.852,21.259
NetC3_2: C3.2 U1.35 X1.3 | length 4.2
  Top Layer w0.125: X1.3 17.423,27.798 17.423,26.987 C3.2 17.433,26.968 18.179,26.221 19.583,26.221 19.895,25.91 U1.35
NetC4_2: C4.2 U1.34 X1.1 | length 5.3
  Top Layer w0.125: C4.2@18.403,26.95 17.981,27.371 17.981,28.425 18.663,29.107 X1.1 ; C4.2@18.427,26.974 C4.2 ; C4.2@18.508,26.892 18.664,26.736 18.664,26.667 18.86,26.472 19.93,26.472 20.293,26.108 U1.34@20.293,25.594
NetC6_2: C6.2 U1.33 | length 1.4
  Top Layer w0.125: C6.2@20.227,26.795 20.692,26.33 U1.33@20.692,25.595 ; C6.2@20.258,26.876 C6.2@20.258,26.926
NetC7_2: C7.2 U1.32 | length 1.3
  Top Layer w0.125: U1.32@21.093,25.594 C7.2@21.093,26.859 ; C7.2@21.119,26.945 C7.2@21.123,26.94
NetC8_1: C8.1 U1.1 | length 2.8
  Top Layer w0.15: C8.1 17.451,18.873 18.123,19.544 U1.1@19.493,19.544
NetC9_2: C9.2 U1.2 X2.2 | length 3.2
  Top Layer w0.125: X2.2 18.958,17.408 18.958,17.829 19.259,18.13 19.259,18.381 C9.2 19.423,18.495 19.893,18.964 U1.2@19.893,19.544
NetC10_2: C10.2 U1.3 X2.1 | length 2.9
  Top Layer w0.125: C10.2@20.293,18.496 U1.3@20.293,19.544 ; C10.2@20.294,18.495 20.294,18.097 21.02,17.371 X2.1
NetC16_2: C16.2 IC1.6 | length 1.8
  Top Layer w0.125: C16.2 23.593,10.96 24.272,11.639 IC1.6
NetIC2_3: IC2.3 P1.2 | length 9.4
  Top Layer w0.254: IC2.3 21.527,14.451 21.725,14.253 21.831,14.253 22.607,13.478 P1.2@29.956,13.478 ; P1.2@29.433,13.468 P1.2@29.517,13.553
NetL1_1: L1.1 L2.2 | length 1.2
  Top Layer w0.125: L2.2 15.892,21.422 16.363,21.892 L1.1
NetL2_1: L2.1 U1.47 | length 1.7
  Top Layer w0.125: L2.1 17.242,21.372 17.714,20.899 U1.47@18.732,20.899
NetL4_2: L4.2 PS1.2 | length 7.3
  Top Layer w0.254: L4.2@4.829,20.109 4.829,17.659 7.402,15.086 PS1.2@7.402,13.84
NetPS1_4: PS1.4 R2.1 R3.2
SDO: IC1.3 U1.9 | length 5.8
  Top Layer w0.125: U1.9@22.693,19.544 22.693,19.077 22.409,18.793 22.409,16.61 22.482,16.537 24.131,16.537 24.204,16.61 24.204,17.432 IC1.3
SWDCLK: J?.2 U1.25 | length 6.2
  Top Layer w0.125: U1.25@23.893,25.475 24.083,25.286 28.127,25.286 28.502,24.911 28.502,24.904 J?.2
SWDIO: J?.3 U1.26 | length 10
  Top Layer w0.125: U1.26 23.495,25.91 23.776,26.191 24.014,26.191 24.538,25.667 30.775,25.667 31.552,24.89 31.552,24.883 31.934,24.501 J?.3
VDD_nRF: C1.2 C5.1 C13.2 C14.2 C17.2 IC1.7 IC2.5 PS1.3 R2.2 U1.13 U1.36 U1.48 | length 79.3
  Top Layer w0.125: IC1.7@25.542,11.639 IC1.7
  Top Layer w0.254: C5.1@17.237,20.172 17.237,20.207 17.485,20.455 18.669,20.455 U1.48 ; C1.2@17.667,25.792 17.667,25.749 U1.36@19.468,25.749 ; IC2.5@18.827,13.151 IC2.5 ; U1.13 24.728,20.461 25.687,20.461 C13.2 27.56,20.309 27.617,20.252 v1@27.656,20.252 ; IC1.7@25.542,11.639 25.887,11.295 25.887,10.648 25.868,10.63 C17.2
  Top Layer w0.4: 12.816,9.978 13.626,9.168 24.711,9.168 25.838,10.295 25.838,10.555 25.848,10.565 C17.2 ; 13.226,11.12 16.796,11.12 IC2.5@18.827,13.151 ; 13.226,19.27 16.335,19.27 C5.1@17.237,20.172 ; 14.444,25.136 17.01,25.136 C1.2@17.667,25.792
  Top Layer w0.7: R2.2 6.642,11.016 6.642,9.996 6.624,9.978 12.816,9.978 13.226,10.388 13.226,11.12 13.217,11.129 v1(13.217,15.97) ; v1@13.226,16.005 v1@13.445,16.224 ; 13.226,16.169 13.217,16.161 v1(13.217,15.97) ; 13.226,16.186 13.328,16.288 v1(13.328,16.362) 13.328,16.63 ; v1(13.379,15.589) 13.379,16.159 ; 14.444,25.136 13.226,23.918 13.226,19.27 13.226,16.119 13.217,16.111 v1(13.217,15.97)
  Bottom Layer w0.7: v1(13.988,15.993) 14.085,16.09 27.246,16.09 27.656,16.5 v1@27.656,20.252
  other v1: 13.799,15.621 13.576,15.983 13.737,16.349 27.668,20.292
VIN: BT1.1 C15.2 L4.1 PS1.5 PS1.7 | length 8.5
  Top Layer w0.254: PS1.5@8.118,13.464 8.549,13.464 8.697,13.315 8.697,12.037 8.846,11.888 11.265,11.888 11.413,12.037 11.413,13.871 10.72,14.565 10.239,14.565 C15.2@9.905,14.899
pads on no net: IC1.2 P1.0 U1.4 U1.5 U1.6 U1.8 U1.12 U1.14 U1.15 U1.16 U1.17 U1.18 U1.19 U1.20 U1.21 U1.22 U1.23 U1.24 U1.27 U1.28 U1.29 U1.37 U1.38 U1.39 U1.40 U1.41 U1.42 U1.43 U1.44
copper on no net:
  other v1: 38.65,2.739 34.015,4.318 36.027,4.344 39.083,4.904 37.632,6.636 40.509,7.068 35.365,7.272 36.46,7.272 39.007,7.96 34.194,7.985 35.9,8.928 36.664,9.208 41.553,9.844 38.472,9.946 35.263,10.939 32.36,10.965 41.579,11.474 35.773,15.319 32.768,15.676 39.109,16.007 41.426,16.338 31.061,16.746 35.009,16.746 32.335,17.586 37.25,17.611 38.905,17.713 36.358,18.63 42.215,19.063 33.583,19.19 31.673,19.445 37.657,20.234 35.212,20.438 39.338,20.489 31.443,20.82 35.62,21.839 41.528,22.348 38.472,22.45 36.027,22.552 39.491,23.647 37.046,23.901 41.146,24.334 38.192,24.971 35.823,25.175

## Polygon pours and split planes (outlines as drawn)
GND on Bottom Layer "GND_L02_P009" (solid, pour order 9): 33.569,32.86 33.791,32.86 33.791,32.556 35.697,32.556 35.697,31.8 35.296,31.8 35.296,27.558 39.701,27.558 39.701,30.191 40.694,30.191 40.694,32.549 43.201,32.549 43.201,2.374 0.022,2.374 0.022,32.858 33.79,32.858
GND on Bottom Layer "GND_L02_P008" (solid, pour order 8): 24.051,24.904 24.01,20.305 22.31,18.604 20.916,18.604 19.334,20.187 19.334,24.904 19.421,24.904
GND on Bottom Layer "GND_L02_P006" (solid, pour order 6): 3.08,14.679 14.763,14.679 14.763,5.833 11.369,5.833 8.71,8.492 8.71,11.351 5.654,11.351 5.422,11.583 5.422,13.551 3.222,13.551 3.072,13.701
GND on Top Layer "GND_L01_P003" (solid, remove dead copper, pour order 3): 33.569,32.86 33.791,32.86 33.791,32.556 35.697,32.556 35.697,31.8 35.296,31.8 35.296,27.558 39.701,27.558 39.701,30.191 40.694,30.191 40.694,32.549 43.201,32.549 43.201,2.497 0.022,2.497 0.022,32.858 33.79,32.858

## Keep-outs
Keep-Out Layer:
  lines w0.125: -0.001,2.374 9.74,2.374 31.338,2.374 43.195,2.374 43.195,32.935 29.709,32.935 8.112,32.935 -0.001,32.935 -0.001,2.374

## Other copper
Top Layer:
  region net VDD_nRF: 13.573,17.378 ccw(c14.729,17.554) 14.873,16.393 14.873,15.689 ccw(c14.775,14.332) 13.9,15.374 ccw(c14.415,14.673) 13.557,14.817
  region net ANT: 21.799,25.678 21.799,25.884 ccw(c21.512,25.884) 21.715,26.087 cw(c21.752,26.124) 21.7,26.124 21.7,26.152 22.095,26.152 22.095,26.153 22.095,26.146 cw(c21.981,26.146) 22.062,26.065 ccw(c22.232,25.894) 21.991,25.894 21.991,25.679
  region net GND: 6.926,12.809 5.911,12.809 5.488,12.386 5.488,11.787 5.694,11.581 7.059,11.581 7.152,11.675 7.152,12.567
  region net VDD_nRF: 3.091,10.751 7.056,10.751 7.066,10.731 7.066,11.329 5.171,11.329 5.171,12.32 5.912,13.003 7.14,13.003 7.14,13.355 5.695,13.355 5.385,13.045 3.091,13.033
  region net VIN: 7.937,14.367 8.413,14.367 8.491,14.445 10.789,14.445 10.789,15.385 11.349,15.945 11.349,24.242 13.874,26.767 14.204,26.767 14.204,29.3 14.134,29.37 11.671,29.37 7.937,25.636
  region net GND: 7.086,14.102 5.55,14.099 5.154,13.703 3.062,13.703 3.062,14.697 5.262,14.694 5.497,14.459 7.09,14.459
  region net NetL4_2: 3.3,24.208 6.621,24.208 6.621,16.035 7.295,15.361 6.938,15.361 3.307,18.992
  region net NetL4_2: 6.879,13.641 7.533,13.641 7.533,13.84 6.879,13.84
  region net NetPS1_4: 8.14,10.716 7.393,10.716 7.393,12.349 7.926,12.882 7.926,13.111 8.37,13.111 8.37,12.87 8.14,12.64
Bottom Layer:
  region net VDD_nRF: 13.538,14.82 cw(c14.395,14.676) 13.881,15.376 cw(c14.756,14.335) 14.756,15.695 cw(c14.756,14.335) 14.853,15.692 14.853,16.396 cw(c14.71,17.557) 14.71,16.387 cw(c14.71,17.557) 13.554,17.381 13.538,14.852 13.554,17.381 12.857,17.381 12.857,14.82 13.538,14.82

## Silkscreen, mask and mechanical layers (free items; w line width, h text height)
Top Overlay:
  lines w0.1: 17.92,17.98 24.098,17.98 24.098,19.035 17.92,19.035 17.92,17.98
  lines w0.125: 19.714,26.395 20.658,26.395 20.783,26.395 20.783,29.379 19.714,29.379 19.714,26.395 ; 26.992,28.255 26.992,31.67 28.441,31.67 28.441,28.255 26.992,28.255 ; 29.788,16.865 29.788,18.455 36.748,18.455 36.748,16.865 29.788,16.865
  text "*" at 27.337,30.442 h1
  text "*" at 19.927,28.414 h1
  text "**" at 22.101,18.016 h1
  text "**" at 34.87,17.152 h1

## Text inside footprints (layer, text, board x,y; h text height)
ANT1: Mechanical 2 "Please see datasheet for further information." at 35.236,27.025 h0.3; Mechanical 2 "(All Layers)" at 35.686,28.125 h0.3; Mechanical 2 "4.7pF 0402 Capacitor" at 40.936,30.275 h0.25; Mechanical 2 "Copper trace 0.8mm x 0.5mm" at 40.886,32.075 h0.25; Mechanical 2 "FTE" at 38.636,29.975 h0.3; Mechanical 2 "GND" at 34.686,32.075 h0.3; Mechanical 2 "Feed" at 34.086,30.975 h0.3; Mechanical 2 "GND" at 41.486,31.475 h0.3; Mechanical 2 "COPPER KEEPOUT" at 35.436,28.725 h0.3; Mechanical 2 "PCB EDGE" at 36.786,33.025 h0.3; Mechanical 4 "Place 0402 Here" at 40.786,30.775 h0.3